# Altium PCB EA3036C.PcbDoc
Units mil, origin at the board's own origin, x right, y up, seen from the top; angles counter-clockwise.
Board outline 6000 x 4000 mil, 2 copper layers (Top Layer, Bottom Layer); 38 components, 15 nets, 89 pads, 0 vias.
Unrouted connection lines stored in the file: 68.
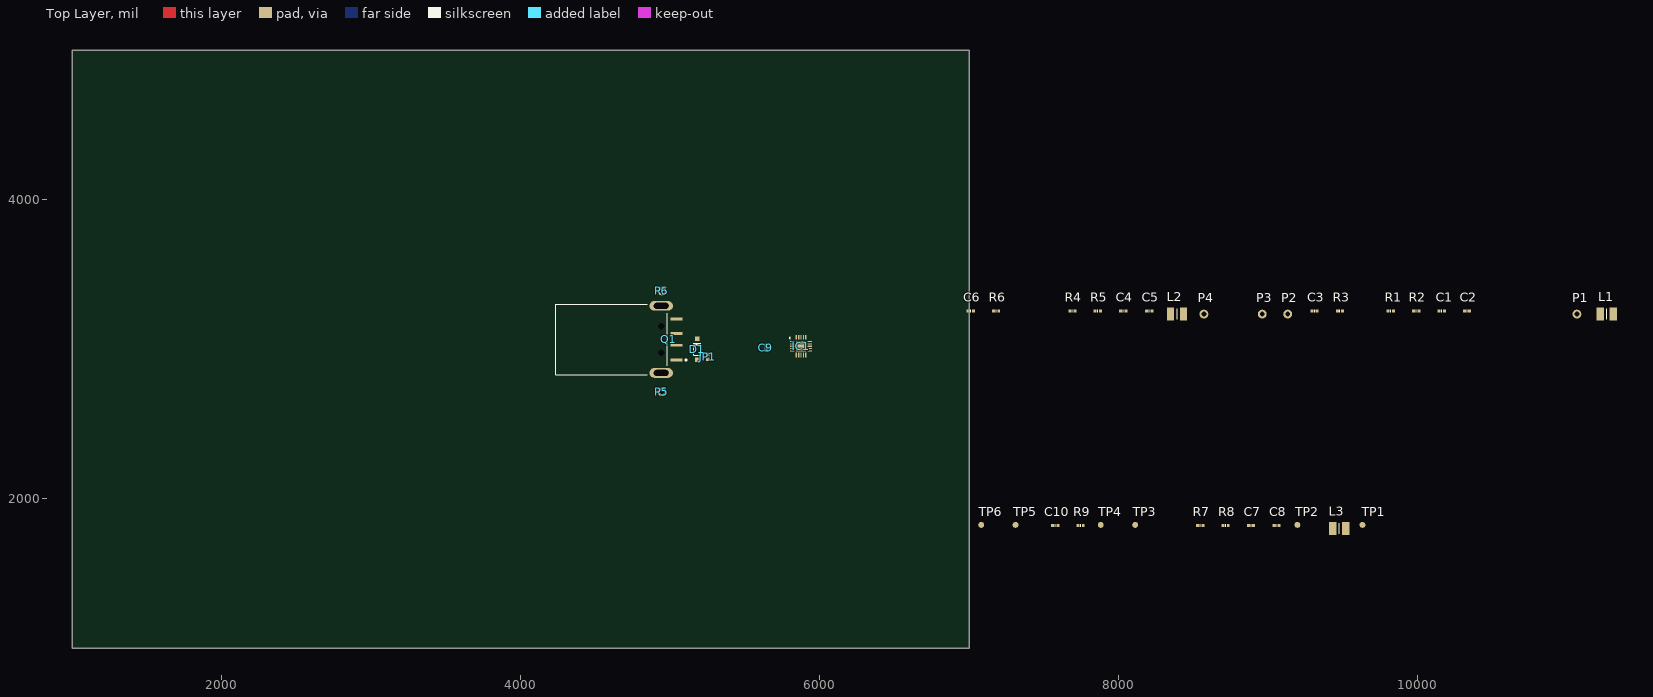
[diagram p0: Top Layer view]
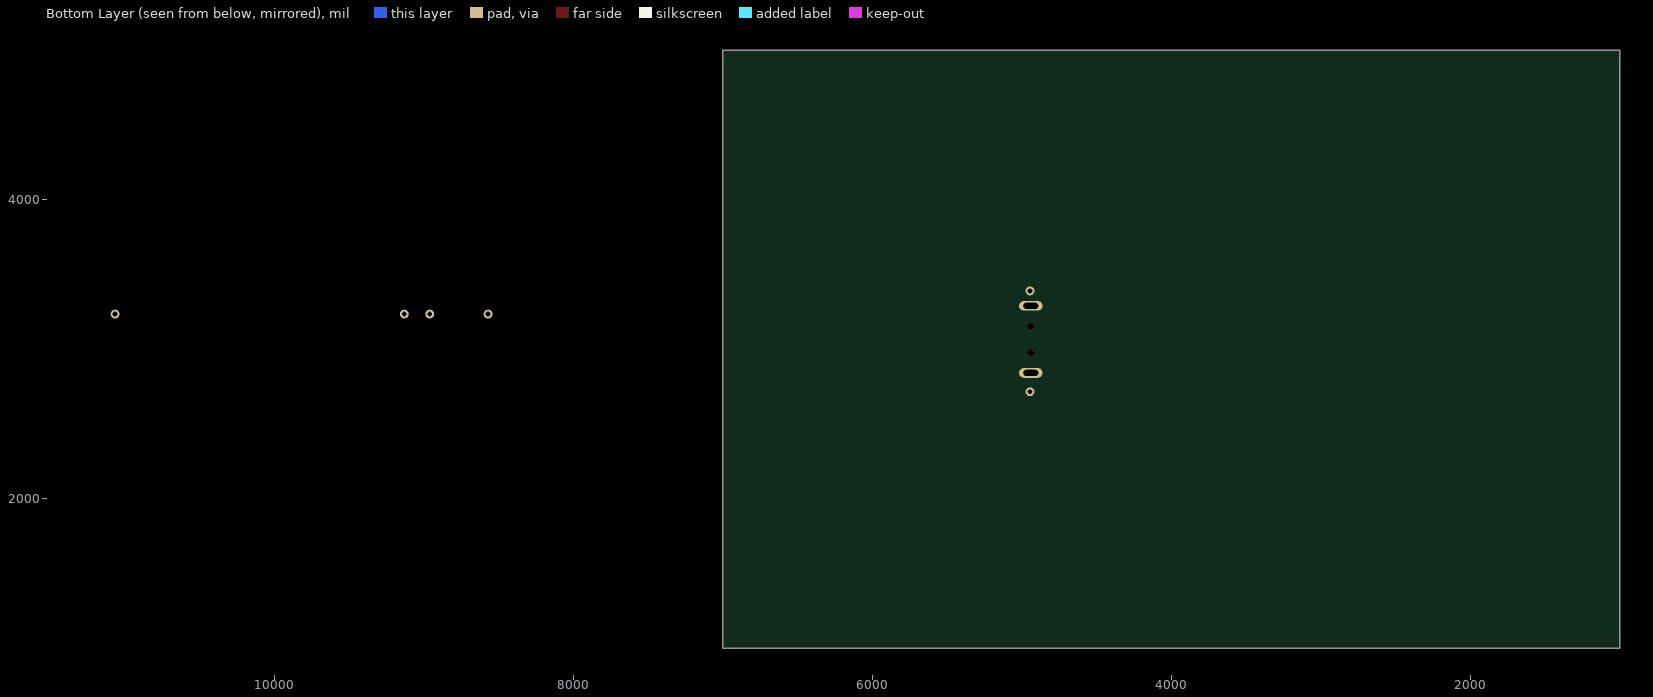
[diagram p1: Bottom Layer view, seen from below]

## Layer stack, top to bottom
Top Solder: solder mask 0.4, Solder Resist, Dk 3.5
Top Layer: signal copper 1.4
Dielectric 1: dielectric 12.6, FR-4, Dk 4.8
Bottom Layer: signal copper 1.4
Bottom Solder: solder mask 0.4, Solder Resist, Dk 3.5

## Board outline
1000,1000 7000,1000 7000,5000 1000,5000

## Design rules (kind name [scope] priority, off if disabled: settings)
Clearance [All] p1: gap=10 ignorepadtopadclearanceinfootprint=FALSE except(0: Arc-Hole Track-Hole SMDPad-Hole THPad-Hole Via-Hole Fill-Hole Poly-Hole Region-Hole Text-Hole)
PolygonConnect [All] p1: connectstyle=Relief reliefconductorwidth=10 reliefentries=4 polygonreliefangle="90 Angle" airgapwidth=10
RoutingVias [All] p1: holewidth=28 width=50 viastyle="Through Hole" minholewidth=28 minwidth=50 maxholewidth=28 maxwidth=50
SolderMaskExpansion [All] p1: expansion=4 istentingtop=FALSE
Width [All] p1: maxlimit=10 minlimit=10 preferedwidth=10
30 further rules are at their usual default settings.

## Components (designator, comment, footprint, x,y, rotation, side; value= is the part's Value field where it differs from the comment)
C1 "10uF/10V" CAP-0402 10160,3255 r0 top
C2 "100nF/10V" CAP-0402 10330,3255 r0 top
C3 "10uF/10V" CAP-0402 9310,3255 r0 top
C4 "10uF/10V" CAP-0402 8030,3255 r0 top
C5 "100nF/10V" CAP-0402 8205,3255 r0 top
C6 "10uF/10V" CAP-0402 7010,3255 r0 top
C7 "10uF/10V" CAP-0402 8885,1820 r0 top
C8 "100nF/10V" CAP-0402 9055,1820 r0 top
C9 "100nF/10V" CAP-0402 5640,3010 r270 top
C10 "10uF/10V" CAP-0402 7575,1820 r0 top
D1 "40V 2A 380mV@2A" SOD_123 5180,3000 r270 top
IC1 "EA3036C" QFN3mmx3mm-20 5875,3020 r0 top
JP1 "Select" 选择焊点-0402 5250,2950 r90 top
L1 "10uH" L-2520 11265,3235 r0 top
L2 "10uH" L-2520 8390,3235 r0 top
L3 "10uH" L-2520 9475,1800 r0 top
P1 "HDR1x2_2.54" HDR1X1_2.54 11065,3235 r0 top
P2 "HDR1x2_2.54" HDR1X1_2.54 9130,3235 r0 top
P3 "HDR1x2_2.54" HDR1X1_2.54 8960,3235 r0 top
P4 "HDR1x2_2.54" HDR1X1_2.54 8570,3235 r0 top
P5 "HDR1x2_2.54" HDR1X1_2.54 4945,2715 r0 top
P6 "HDR1x2_2.54" HDR1X1_2.54 4945,3390 r0 top
Q1 "USB Type-A" USB-A-male 4670,3060 r180 top
R1 "10k" R-0402 9820,3255 r0 top
R2 "510k" R-0402 9990,3255 r0 top
R3 "110k" R-0402 9480,3255 r0 top
R4 "10k" R-0402 7690,3255 r0 top
R5 "316k" R-0402 7860,3255 r0 top
R6 "100k" R-0402 7180,3255 r0 top
R7 "10k" R-0402 8545,1820 r0 top
R8 "100k" R-0402 8715,1820 r0 top
R9 "100k" R-0402 7745,1820 r0 top
TP1 "TestPoint" TestPoint 9630,1825 r90 top
TP2 "TestPoint" TestPoint 9195,1825 r90 top
TP3 "TestPoint" TestPoint 8110,1825 r90 top
TP4 "TestPoint" TestPoint 7880,1825 r90 top
TP5 "TestPoint" TestPoint 7310,1825 r90 top
TP6 "TestPoint" TestPoint 7080,1825 r90 top

## Footprints (in the part's own frame and the unit in brackets; to place one, negate y for a bottom-side part, rotate by r counter-clockwise, add the part's x,y. Pads: shape width x height; smd on the part's side, far side on the other; paste and mask are expansions set on the pad)
CAP-0402 [mm]
  rrect25% 0.5x0.55 smd: 1(-0.45,0) 2(0.45,0)
  silkscreen extent 0,-0.2 0,0.2, body extent -0.5,-0.25 0.5,0.25, height 0.6
HDR1X1_2.54 [mm]
  round 1.5 hole 0.813: 1(0,0)
L-2520 [mm]
  rect 1.25x2.2 smd: 1(-1.1,0) 2(1.1,0)
  silkscreen extent 0,-0.9 0,0.9, body extent -1.25,-1 1.25,1, height 1
QFN3mmx3mm-20 [mm]
  rect 0.8x0.2 smd: 1(-1.5,0.8) 2(-1.5,0.4) 3(-1.5,0) 4(-1.5,-0.4) 5(-1.5,-0.8) 11(1.5,-0.8) 12(1.5,-0.4) 13(1.5,0) 14(1.5,0.4) 15(1.5,0.8)
  rect 0.2x0.8 smd: 6(-0.8,-1.5) 7(-0.4,-1.5) 8(0,-1.5) 9(0.4,-1.5) 10(0.8,-1.5) 16(0.8,1.5) 17(0.4,1.5) 18(0,1.5) 19(-0.4,1.5) 20(-0.8,1.5)
  rect 1.75x1.75 smd: 21(0,0)
  silkscreen extent -2,1.3 -1.8,1.5, body extent -1.55,-1.55 1.55,1.55, height 0.8
R-0402 [mm]
  rrect25% 0.5x0.55 smd: 1(-0.45,0) 2(0.45,0)
  silkscreen extent 0,-0.2 0,0.2, body extent -0.5,-0.25 0.5,0.25, height 0.3
SOD_123 [mm]
  rect 0.8x0.8 smd: 1(1.8,0) 2(-1.8,0)
  silkscreen extent -1.02,-0.6 1.02,0.6, body extent -1.95,-0.85 1.9,0.85, height 1.42
TestPoint [mm]
  round 1 smd: 1(0,0)
USB-A-male [mm]
  rect 2.1x0.5 smd: 1(-9.453,3.354) 2(-9.453,0.854) 3(-9.453,-1.146) 4(-9.453,-3.646)
  oval 4x1.65 hole 1 slot 2.5 at 0 deg: 5(-6.853,-5.846) 6(-6.853,5.554)
  round 0.8 hole 1.1 unplated: MH1(-6.853,-2.396) MH2(-6.853,2.104)
  silkscreen extent -11.18,-6.15 11.05,5.85, body extent -7.77,-6.16 10.56,5.85, height 1.75
选择焊点-0402 [mm]
  rect 0.6x0.62 smd: 1(-0.432,0) 2(0.432,0)

## Part data
C1 C3 C4 C6 C7 C10: library part CAP, "CC0402MRX5R6BB106(±20%)", Package=0402, SuppliersPartNumber=C52923, ComponentLink1Description=供应商链接, ComponentLink1URL=http://www.szlcsc.com/product/details_53938.html, Supplier=LC
C2 C5 C8 C9: library part CAP, "CC0402KRX5R6BB104(±10%)", Package=0402, SuppliersPartNumber=C52923, ComponentLink1Description=供应商链接, ComponentLink1URL=http://www.szlcsc.com/product/details_53938.html, Supplier=LC
D1: library part DIODE, "PSBD1DF40V2L", Package=SMA(DO-214AC), SuppliersPartNumber=C22452, ComponentLink1Description=供应商链接, ComponentLink1URL=http://www.szlcsc.com/product/details_23178.html, Supplier=LC
IC1: "EA3036 is a 3CH power management IC for applications powered by one Li-Ion battery or a DC 5V adapter."
JP1: "选择焊点"
L1 L2 L3: library part INDUCTOR, "电感", Package=0402, SuppliersPartNumber=C32041, ComponentLink1Description=供应商链接, ComponentLink1URL=http://www.szlcsc.com/product/details_33003.html, Supplier=LC
P1 P2 P3 P4 P5 P6: library part HDR1x1_2.54, "Header"
Q1: library part "USB A", "U217-041N-4BV81"
R1 R4 R7: library part RES, "RC0402FR-0710KL", Package=0805, SuppliersPartNumber=C17798, Supplier=LC
R2 R3: library part RES, "RC0402FR-07510KL", Package=0805, SuppliersPartNumber=C17798, Supplier=LC
R5: library part RES, "RC0402FR-07316KL", Package=0805, SuppliersPartNumber=C17798, Supplier=LC
R6 R8 R9: library part RES, "RC0402FR-07100KL", Package=0805, SuppliersPartNumber=C17798, Supplier=LC
TP1 TP2 TP3 TP4 TP5 TP6: "测试点"

## Nets (pads, with @x,y where several pads share a name; then routed paths per layer and width w, separated by ;. In a path a pad name is that pad's centre, name@x,y a point inside that pad or via, vN(x,y) a via of type N, cw(c..) or ccw(c..) an arc to the next point about the centre after c; other vN are vias at no path point)
EN1: IC1.18 R7.1
EN2: IC1.9 R1.1
EN3: IC1.8 R4.1
GND: C1.1 C2.1 C3.1 C4.1 C5.1 C6.1 C7.1 C8.1 C9.1 C10.1 IC1.1 IC1.4 IC1.5 IC1.12 IC1.13 IC1.15 IC1.17 IC1.21 P4.1 P6.1 Q1.4 R3.1 R6.1 R9.1 TP6.1
NetIC1_2: IC1.2 R8.1 R9.2
NetIC1_3: IC1.3 R5.1 R6.2
NetIC1_6: IC1.6 L2.1
NetIC1_11: IC1.11 L1.1
NetIC1_14: IC1.14 R2.1 R3.2
NetIC1_20: IC1.20 L3.1
VBUS: D1.1 JP1.1 P5.1 Q1.1 TP1.1
VCC_1V2: C7.2 C8.2 L3.2 P3.1 R8.2 TP5.1
VCC_2V5: C4.2 C5.2 L2.2 P2.1 R5.2 TP4.1
VCC_3V3: C1.2 C2.2 L1.2 P1.1 R2.2 TP3.1
VCC_5V: C3.2 C6.2 C9.2 C10.2 D1.2 IC1.7 IC1.10 IC1.16 IC1.19 JP1.2 R1.2 R4.2 R7.2 TP2.1
pads on no net: Q1.2 Q1.3 Q1.5 Q1.6 Q1.MH1 Q1.MH2